# EAGLE board MOTOR WITH LDR (EAGLE 6.5.0)
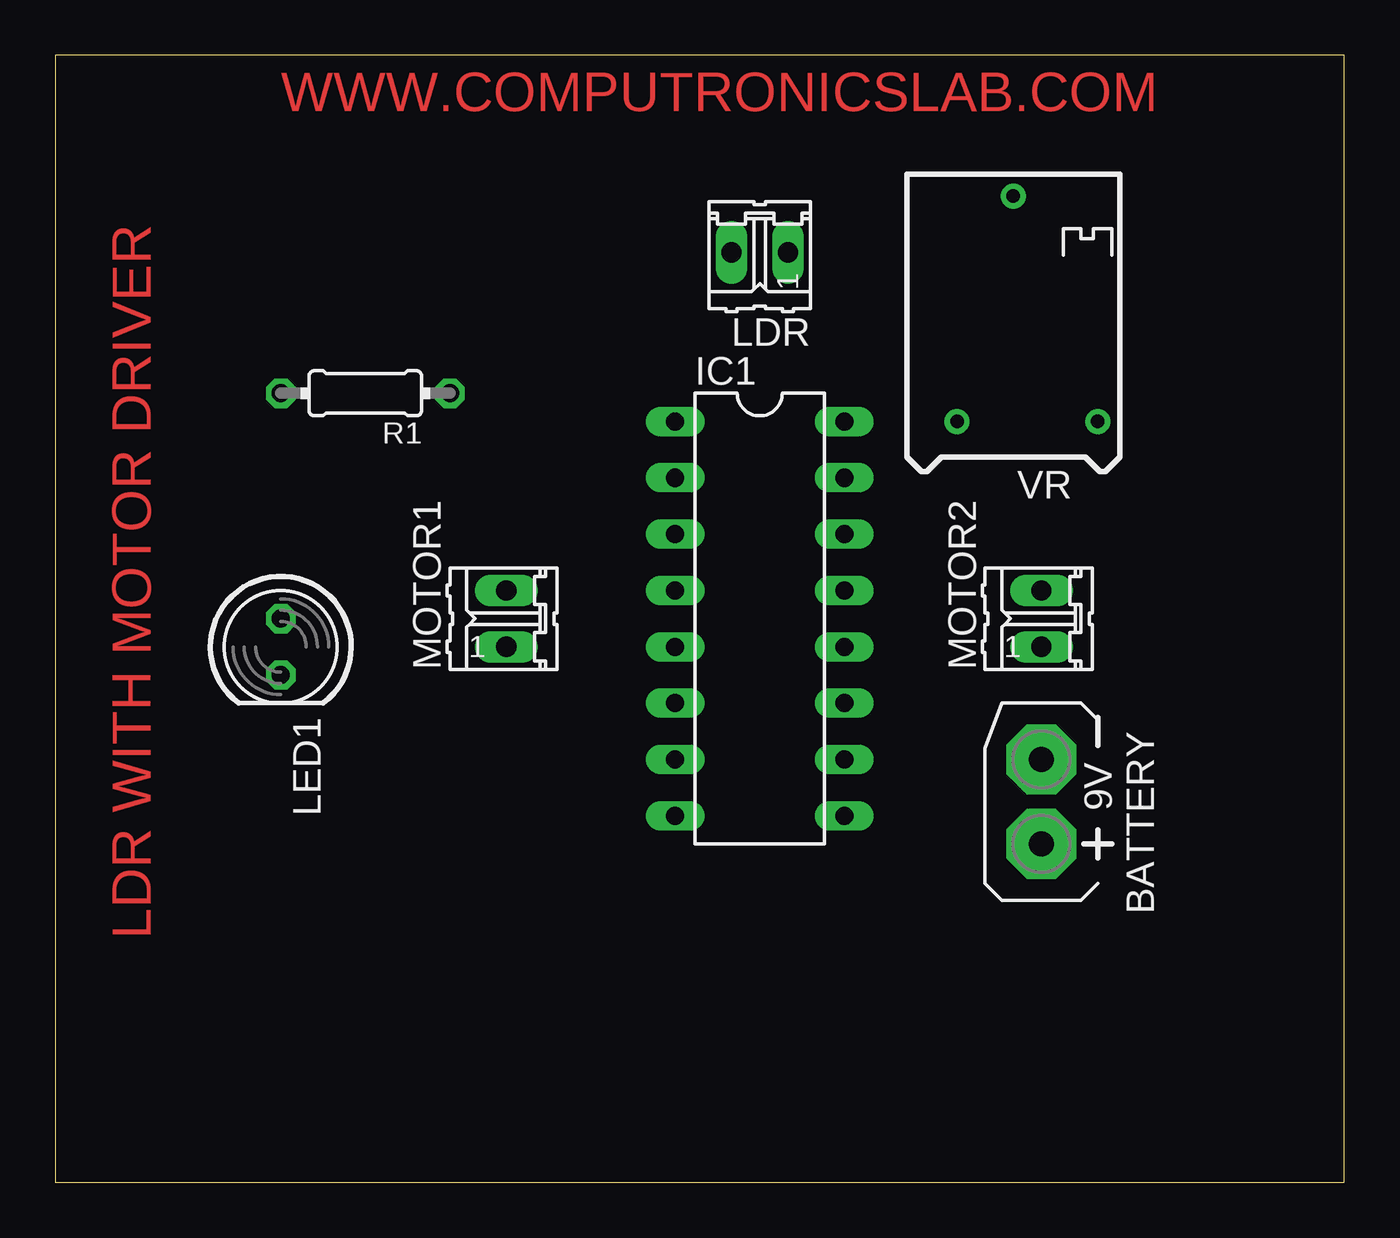
[diagram p0: board, top side]
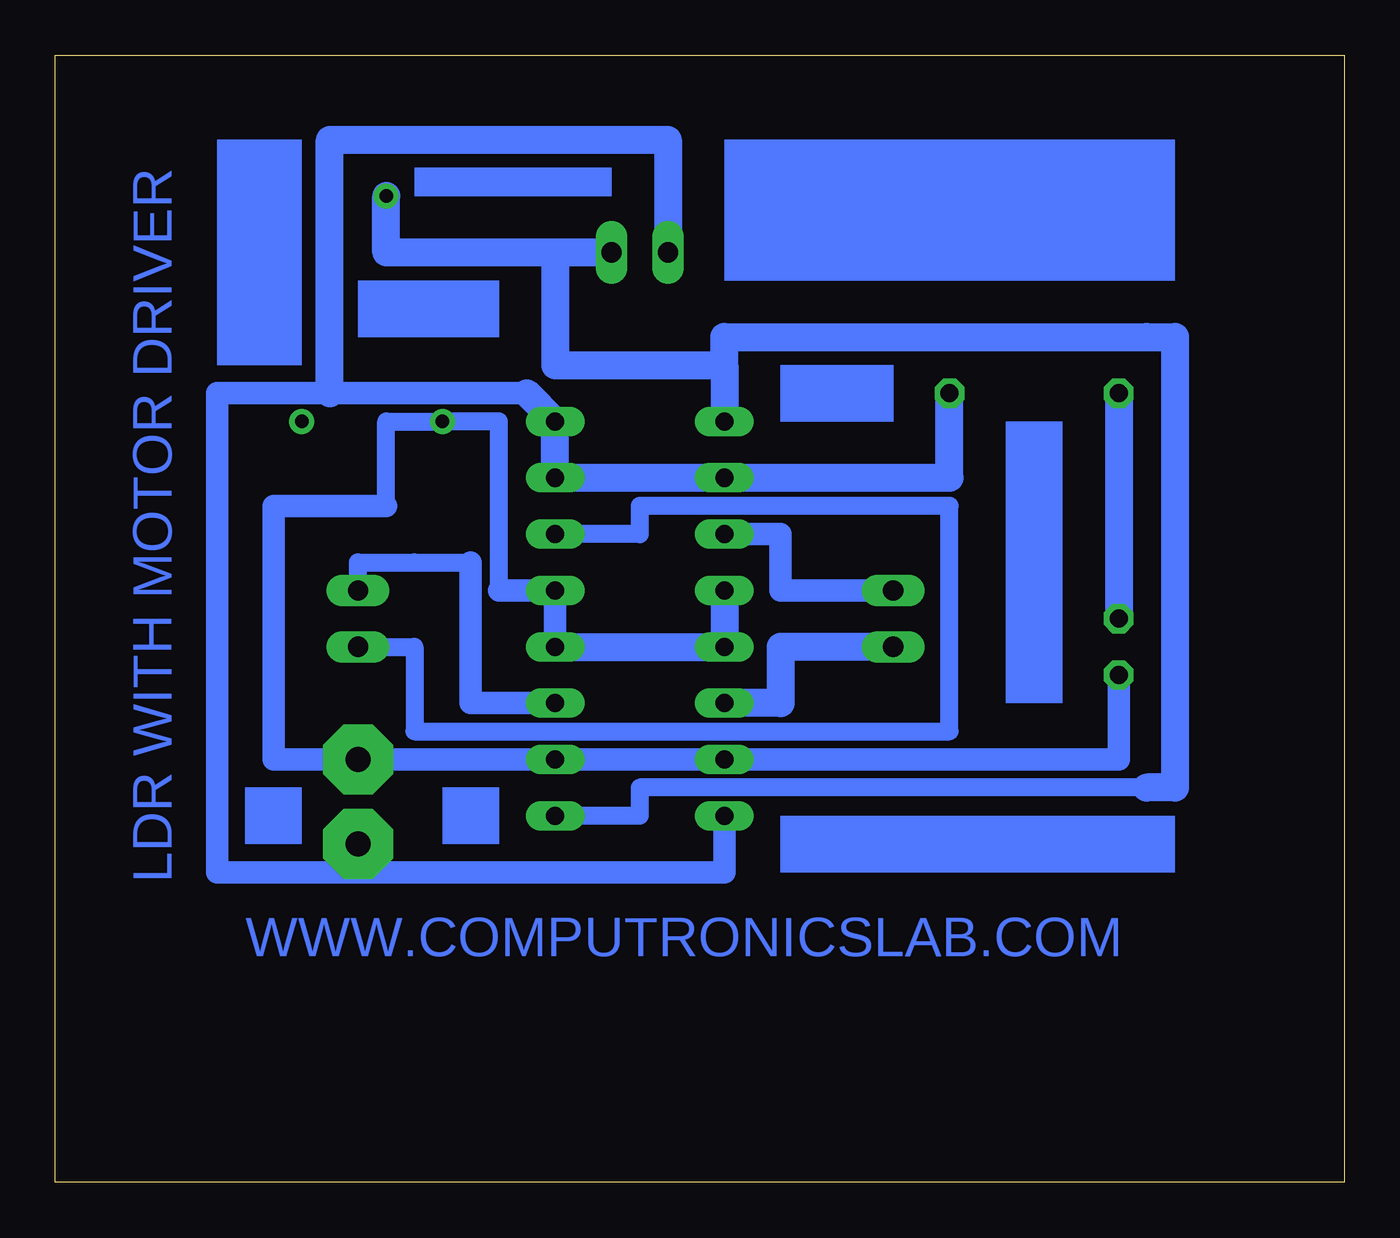
[diagram p1: board, bottom side, seen from below]

Size 58.09 x 50.79 mm. Coordinates in mm from the lower left corner, seen from the top.
Outline: 0,0 58.09,0 58.09,50.79 0,50.79 0,0
Copper layers (1*16): Top 0.035mm / dielectric 1.5mm / Bottom 0.035mm
Design rules "default": minimum track width 10mil, minimum drill 24mil, track to track 8mil, track to pad 8mil, pad to pad 8mil, via to via 8mil, smd to smd 8mil, copper to edge 40mil, drill to drill 8mil, minimum pad ring 10mil, minimum via ring 8mil, stop-mask expansion 4mil, vias tented up to drill 0mil, thermal gap 10mil

## Footprints (pad centres in the part's own frame; a part is rotated, then mirrored left to right if it is on the bottom)
AB9V = drill 1.118 pad 3.15 octagon: + 0,2.54; - 0,-1.27
DIL16 = drill 0.813 long: 1 -8.89,-3.81; 2 -6.35,-3.81; 3 -3.81,-3.81; 4 -1.27,-3.81; 5 1.27,-3.81; 6 3.81,-3.81; 7 6.35,-3.81; 8 8.89,-3.81; 9 8.89,3.81; 10 6.35,3.81; 11 3.81,3.81; 12 1.27,3.81; 13 -1.27,3.81; 14 -3.81,3.81; 15 -6.35,3.81; 16 -8.89,3.81
02P = drill 0.914 long: 1 -1.27,0; 2 1.27,0
LED5MM = drill 0.813 octagon: A -1.27,0; K 1.27,0
0204/7 = drill 0.813 octagon: 1 -3.81,0; 2 3.81,0
RTRIM64P = drill 0.61: 1 -2.54,-3.81; 2 7.62,0; 3 -2.54,2.54

## Placement (x,y rotation side)
BATTERY  9V  [AB9V]  44.45,17.78 180 top
IC1  L293D  [DIL16]  31.75,25.4 270 top
LDR  [02P]  31.75,41.91 180 top
LED1  5MM  [LED5MM]  10.16,24.13 270 top
MOTOR1  [02P]  20.32,25.4 90 top
MOTOR2  [02P]  44.45,25.4 90 top
R1  330E  [0204/7]  13.97,35.56 180 top
VR  20K  [RTRIM64P]  43.18,36.83 90 top

## Library data of the parts
BATTERY = battery
IC1 = st-microelectronics; MPN: L293D; OC_FARNELL: 9589619; OC_NEWARK: 56P8249
LDR MOTOR1 MOTOR2 = con-amp-quick; OC_FARNELL: unknown; OC_NEWARK: unknown
LED1 = led
R1 = rcl
VR = resistor

## Nets
N$1: IC1.14 MOTOR2.1
N$2: IC1.11 MOTOR2.2
N$3: LED1.A R1.2
N$4: BATTERY.+ IC1.2 IC1.8 IC1.15 IC1.16 LDR.2 R1.1
N$6: BATTERY.- IC1.4 IC1.5 IC1.7 IC1.10 IC1.12 IC1.13 LED1.K VR.3
N$7: IC1.1 IC1.9 LDR.1 VR.2
N$10: IC1.6 MOTOR1.1
N$11: IC1.3 MOTOR1.2

## Tracks (layer width: path | path; a pad name or v marks a point on that pad's centre or on a via)
N$1
  Bottom 0.813: IC1.14 31.75,29.21 31.75,30.48 17.78,30.48 17.78,20.32 41.91,20.32 41.91,24.13 MOTOR2.1
N$2
  Bottom 0.813: 39.37,27.94 41.91,27.94 44.45,27.94 MOTOR2.2
  Bottom 1.016: 39.37,27.94 39.37,21.59 IC1.11
N$3
  Bottom 1.27: R1.2 LED1.A
N$4
  Bottom 1.016: 44.45,13.97 27.94,13.97 IC1.8 | 36.83,35.56 45.72,35.56 50.8,35.56 50.8,13.97 44.45,13.97 | 44.45,13.97 BATTERY.+
  Bottom 1.27: R1.1 17.78,31.75 IC1.2 IC1.15 IC1.16 36.83,35.56 | LDR.2 30.48,46.99 45.72,46.99 45.72,35.56
N$6
  Bottom 0.813: 38.1,26.67 38.1,34.29 VR.3 43.18,34.29 43.18,30.48
  Bottom 1.016: 38.1,26.67 IC1.13 IC1.12 | LED1.K 10.16,19.05 IC1.7 IC1.10 BATTERY.- 48.26,19.05 48.26,30.48 43.18,30.48
  Bottom 1.27: IC1.4 IC1.5 IC1.12
N$7
  Bottom 0.813: IC1.9 31.75,16.51 31.75,17.78 8.89,17.78
  Bottom 1.27: VR.2 43.18,41.91 35.56,41.91 | LDR.1 35.56,41.91 | 35.56,41.91 35.56,36.83 27.94,36.83 | 27.94,36.83 IC1.1 | 8.89,17.78 7.62,17.78 7.62,38.1 8.89,38.1 27.94,38.1 27.94,36.83
N$10
  Bottom 1.27: IC1.6 25.4,21.59 25.4,24.13 MOTOR1.1
N$11
  Bottom 1.016: IC1.3 25.4,29.21 25.4,26.67 MOTOR1.2
(copper drawn outside any net)
  shapes: Bottom area x10

## Text on the board
Top: WWW.COMPUTRONICSLAB.COM | LDR WITH MOTOR DRIVER
Bottom: LDR WITH MOTOR DRIVER | WWW.COMPUTRONICSLAB.COM